# Altium PCB PCB1.PcbDoc
Units mil, origin at the board's own origin, x right, y up, seen from the top; angles counter-clockwise.
Board outline 6456.69 x 1771.65 mil, 2 copper layers (Top Layer, Bottom Layer); 73 components, 34 nets, 171 pads, 112 vias.
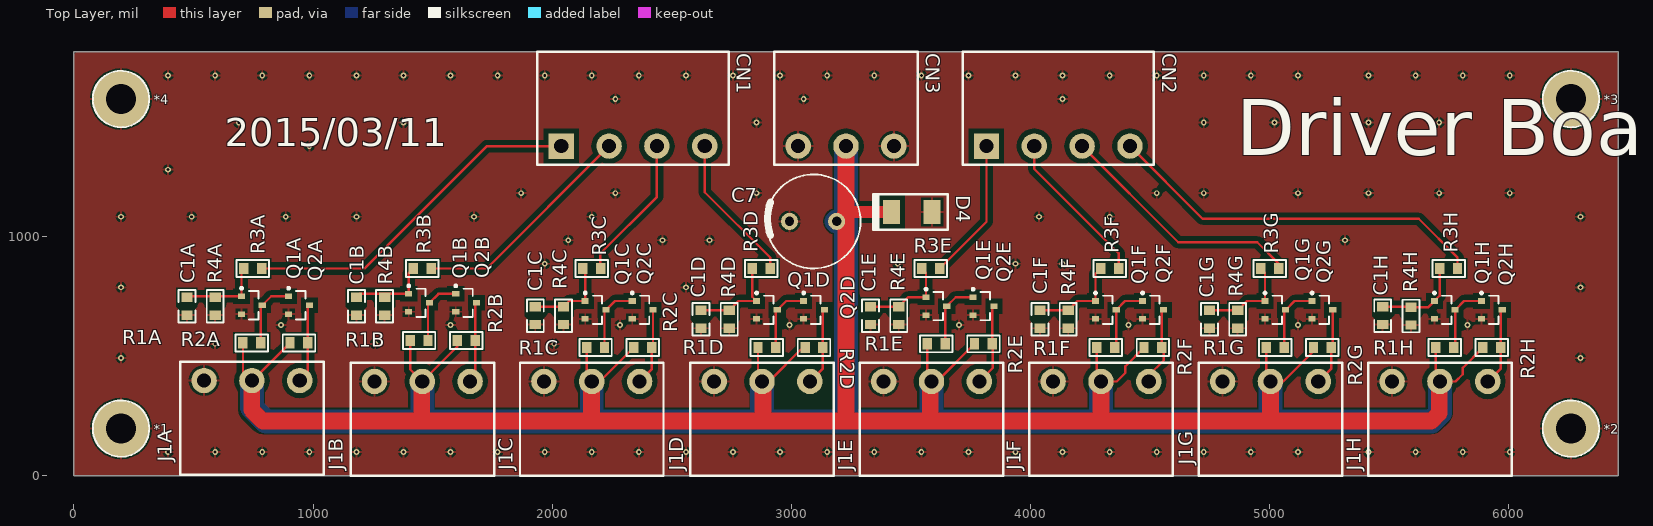
[diagram p0: Top Layer view]
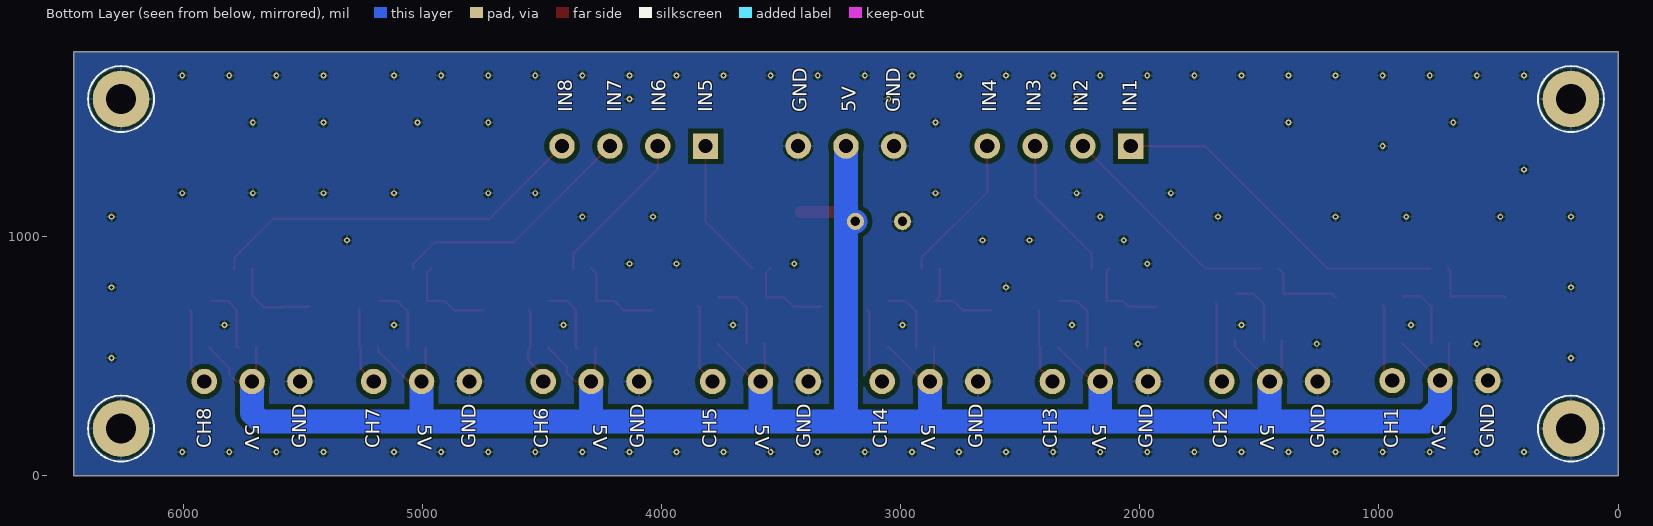
[diagram p1: Bottom Layer view, seen from below]

## Layer stack, top to bottom
Top Solder: solder mask 0.4, Solder Resist, Dk 3.5
Top Layer: signal copper 1.4
Dielectric 1: dielectric 12.6, FR-4, Dk 4.8
Bottom Layer: signal copper 1.4
Bottom Solder: solder mask 0.4, Solder Resist, Dk 3.5

## Board outline
0,0 6456.69,0 6456.69,1771.65 0,1771.65

## Design rules (kind name [scope] priority, off if disabled: settings)
Clearance [All] p1: gap=10 except(20: Poly-Poly SMDPad-Poly Track-Poly Via-Poly Arc-Poly Fill-Poly THPad-Poly)
HoleSize [All] p1: absolutevalues=TRUE maxlimit=99999 minlimit=1 maxpercent=80.000 minpercent=20.000
PolygonConnect [All] p1: connectstyle=Relief reliefconductorwidth=10 reliefentries=4 polygonreliefangle="90 Angle" airgapwidth=10
RoutingVias [All] p1: holewidth=12 width=24 viastyle="Through Hole" minholewidth=12 minwidth=24 maxholewidth=28 maxwidth=50
SilkToSilkClearance [All] p1: silktosilkclearance=0
SilkToSolderMaskClearance [IsPad] p1: minsilkscreentomaskgap=0 clearancetoexposedcopper=TRUE
SolderMaskExpansion [All] p1: expansion=4
UnpouredPolygon [All] p1: allowunpoured=FALSE
Width [All] p1: maxlimit=100 minlimit=10 preferedwidth=10
26 further rules are at their usual default settings.

## Classes and differential pairs
component class A: C1A J1A Q1A Q2A R1A R2A R3A R4A
component class B: C1B J1B Q1B Q2B R1B R2B R3B R4B
component class C: C1C J1C Q1C Q2C R1C R2C R3C R4C
component class D: C1D J1D Q1D Q2D R1D R2D R3D R4D
component class E: C1E J1E Q1E Q2E R1E R2E R3E R4E
component class F: C1F J1F Q1F Q2F R1F R2F R3F R4F
component class G: C1G J1G Q1G Q2G R1G R2G R3G R4G
component class H: C1H J1H Q1H Q2H R1H R2H R3H R4H
channel class Sheet1: U_Sheet11 U_Sheet12 U_Sheet13 U_Sheet14 U_Sheet15 U_Sheet16 U_Sheet17 U_Sheet18
component class Sheet2: C7 CN1 CN2 CN3 D4

## Components (designator, comment, footprint, x,y, rotation, side; value= is the part's Value field where it differs from the comment)
*1 "Comment" SCREWFG3_2 196.85,196.85 r0 top
*2 "Comment" SCREWFG3_2 6259.84,196.85 r0 top
*3 "Comment" SCREWFG3_2 6259.84,1574.8 r0 top
*4 "Comment" SCREWFG3_2 196.85,1574.8 r0 top
C1A "CAP 0.1uF 50V 0805(2012)" C0805 472.44,708.66 r270 top (schematic designator C1)
C1B "CAP 0.1uF 50V 0805(2012)" C0805 1181.1,708.66 r270 top (schematic designator C1)
C1C "CAP 0.1uF 50V 0805(2012)" C0805 1929.13,669.29 r270 top (schematic designator C1)
C1D "CAP 0.1uF 50V 0805(2012)" C0805 2622.05,653.54 r270 top (schematic designator C1)
C1E "CAP 0.1uF 50V 0805(2012)" C0805 3330.71,669.29 r270 top (schematic designator C1)
C1F "CAP 0.1uF 50V 0805(2012)" C0805 4039.37,653.54 r270 top (schematic designator C1)
C1G "CAP 0.1uF 50V 0805(2012)" C0805 4748.03,653.54 r270 top (schematic designator C1)
C1H "CAP 0.1uF 50V 0805(2012)" C0805 5472.44,669.29 r270 top (schematic designator C1)
C7 "CAPACITOR 330uF 20% 35V 10mmX16mm" CA10X16P5 2992.13,1062.99 r0 top
CN1 "HT5.08-4P-H" HT5.08-4P-H 2037.8,1377.95 r0 top
CN2 "HT5.08-4P-H" HT5.08-4P-H 3815.75,1377.95 r0 top
CN3 "HT5.08-3P-H" HT5.08-3P-H 3028.35,1377.95 r0 top
D4 "SMAJ5.0A" SMA 3503.94,1102.36 r270 top
J1A "HT5.08-3P-H" HT5.08-3P-H 944.1,397.64 r180 top (schematic designator J1)
J1B "HT5.08-3P-H" HT5.08-3P-H 1656.69,393.7 r180 top (schematic designator J1)
J1C "HT5.08-3P-H" HT5.08-3P-H 2365.35,393.7 r180 top (schematic designator J1)
J1D "HT5.08-3P-H" HT5.08-3P-H 3077.17,393.7 r180 top (schematic designator J1)
J1E "HT5.08-3P-H" HT5.08-3P-H 3785.83,393.7 r180 top (schematic designator J1)
J1F "HT5.08-3P-H" HT5.08-3P-H 4494.49,393.7 r180 top (schematic designator J1)
J1G "HT5.08-3P-H" HT5.08-3P-H 5203.15,393.7 r180 top (schematic designator J1)
J1H "HT5.08-3P-H" HT5.08-3P-H 5911.81,393.7 r180 top (schematic designator J1)
Q1A "BCV47,SOT23" INF-SOT23_L 744.1,712.6 r0 top (schematic designator Q1)
Q1B "BCV47,SOT23" INF-SOT23_L 1443.07,722.6 r0 top (schematic designator Q1)
Q1C "BCV47,SOT23" INF-SOT23_L 2181.1,692.91 r0 top (schematic designator Q1)
Q1D "BCV47,SOT23" INF-SOT23_L 2897.64,692.91 r0 top (schematic designator Q1)
Q1E "BCV47,SOT23" INF-SOT23_L 3606.3,708.66 r0 top (schematic designator Q1)
Q1F "BCV47,SOT23" INF-SOT23_L 4314.96,692.91 r0 top (schematic designator Q1)
Q1G "BCV47,SOT23" INF-SOT23_L 5023.62,692.91 r0 top (schematic designator Q1)
Q1H "BCV47,SOT23" INF-SOT23_L 5732.28,692.91 r0 top (schematic designator Q1)
Q2A "BCV47,SOT23" INF-SOT23_L 940.95,712.6 r0 top (schematic designator Q2)
Q2B "BCV47,SOT23" INF-SOT23_L 1639.92,722.6 r0 top (schematic designator Q2)
Q2C "BCV47,SOT23" INF-SOT23_L 2377.95,692.91 r0 top (schematic designator Q2)
Q2D "BCV47,SOT23" INF-SOT23_L 3094.49,692.91 r0 top (schematic designator Q2)
Q2E "BCV47,SOT23" INF-SOT23_L 3803.15,708.66 r0 top (schematic designator Q2)
Q2F "BCV47,SOT23" INF-SOT23_L 4511.81,692.91 r0 top (schematic designator Q2)
Q2G "BCV47,SOT23" INF-SOT23_L 5220.47,692.91 r0 top (schematic designator Q2)
Q2H "BCV47,SOT23" INF-SOT23_L 5929.13,692.91 r0 top (schematic designator Q2)
R1A "RES 10K 5% 0805(2012)" R0805 744.1,555.12 r0 top (schematic designator R1)
R1B "RES 10K 5% 0805(2012)" R0805 1443.07,565.12 r0 top (schematic designator R1)
R1C "RES 10K 5% 0805(2012)" R0805 2181.1,535.43 r0 top (schematic designator R1)
R1D "RES 10K 5% 0805(2012)" R0805 2897.64,535.43 r0 top (schematic designator R1)
R1E "RES 10K 5% 0805(2012)" R0805 3606.3,551.18 r0 top (schematic designator R1)
R1F "RES 10K 5% 0805(2012)" R0805 4314.96,535.43 r0 top (schematic designator R1)
R1G "RES 10K 5% 0805(2012)" R0805 5023.62,535.43 r0 top (schematic designator R1)
R1H "RES 10K 5% 0805(2012)" R0805 5732.28,535.43 r0 top (schematic designator R1)
R2A "RES 10K 5% 0805(2012)" R0805 940.95,555.12 r0 top (schematic designator R2)
R2B "RES 10K 5% 0805(2012)" R0805 1639.92,565.12 r0 top (schematic designator R2)
R2C "RES 10K 5% 0805(2012)" R0805 2377.95,535.43 r0 top (schematic designator R2)
R2D "RES 10K 5% 0805(2012)" R0805 3094.49,535.43 r0 top (schematic designator R2)
R2E "RES 10K 5% 0805(2012)" R0805 3803.15,551.18 r0 top (schematic designator R2)
R2F "RES 10K 5% 0805(2012)" R0805 4511.81,535.43 r0 top (schematic designator R2)
R2G "RES 10K 5% 0805(2012)" R0805 5220.47,535.43 r0 top (schematic designator R2)
R2H "RES 10K 5% 0805(2012)" R0805 5929.13,535.43 r0 top (schematic designator R2)
R3A "RES 20K 5% 0805(2012)" R0805 748.03,866.14 r0 top (schematic designator R3)
R3B "RES 20K 5% 0805(2012)" R0805 1456.69,866.14 r0 top (schematic designator R3)
R3C "RES 20K 5% 0805(2012)" R0805 2165.35,866.14 r0 top (schematic designator R3)
R3D "RES 20K 5% 0805(2012)" R0805 2874.02,866.14 r0 top (schematic designator R3)
R3E "RES 20K 5% 0805(2012)" R0805 3582.68,866.14 r0 top (schematic designator R3)
R3F "RES 20K 5% 0805(2012)" R0805 4330.71,866.14 r0 top (schematic designator R3)
R3G "RES 20K 5% 0805(2012)" R0805 5000,866.14 r0 top (schematic designator R3)
R3H "RES 20K 5% 0805(2012)" R0805 5748.03,866.14 r0 top (schematic designator R3)
R4A "RES 10K 5% 0805(2012)" R0805 590.55,708.66 r270 top (schematic designator R4)
R4B "RES 10K 5% 0805(2012)" R0805 1299.21,708.66 r270 top (schematic designator R4)
R4C "RES 10K 5% 0805(2012)" R0805 2047.24,669.29 r270 top (schematic designator R4)
R4D "RES 10K 5% 0805(2012)" R0805 2740.16,653.54 r270 top (schematic designator R4)
R4E "RES 10K 5% 0805(2012)" R0805 3448.82,669.29 r270 top (schematic designator R4)
R4F "RES 10K 5% 0805(2012)" R0805 4157.48,653.54 r270 top (schematic designator R4)
R4G "RES 10K 5% 0805(2012)" R0805 4866.14,653.54 r270 top (schematic designator R4)
R4H "RES 10K 5% 0805(2012)" R0805 5590.55,667.32 r270 top (schematic designator R4)

## Footprints (in the part's own frame and the unit in brackets; to place one, negate y for a bottom-side part, rotate by r counter-clockwise, add the part's x,y. Pads: shape width x height; smd on the part's side, far side on the other; paste and mask are expansions set on the pad)
C0805 [mm]
  rect 1x1.2 smd: 1(-0.95,0) 2(0.95,0)
  silkscreen extent -1.73,-0.9 1.73,0.9, body extent -1.55,-0.7 1.55,0.7, height 1
CA10X16P5 [mm]
  round 1.8 hole 1: 1(0,0) 2(5,0)
  silkscreen extent -2.46,-5 7.54,5, body extent -2.47,-5.01 7.55,5.01, height 16
HT5.08-3P-H [mm]
  round 2.7 hole 1.5: 1(0,0) 2(5.08,0) 3(10.16,0)
  silkscreen extent -2.54,-2 12.7,10, body extent -2.54,-2.03 12.7,10.03, height 12
HT5.08-4P-H [mm]
  rect 2.7x2.7 hole 1.5: 1(0,0)
  round 2.7 hole 1.5: 2(5.08,0) 3(10.16,0) 4(15.24,0)
  silkscreen extent -2.54,-2 17.78,10, body extent -2.54,-2.03 17.78,10.03, height 12
INF-SOT23_L [mm] "SOT23, 3-Leads, Body 2.9x1.3 mm, Pitch 0.95 mm, IPC High Density"
  rect 0.75x0.6 smd: 1(-1.1,0.95) 2(-1.1,-0.95) 3(1.1,0)
  silkscreen extent -1.22,-1.5 0.7,1.92, body extent -0.7,-1.5 0.7,1.5, height 1.1
R0805 [mm]
  rect 1x1.2 smd: 1(-0.95,0) 2(0.95,0)
  silkscreen extent -1.73,-0.9 1.73,0.9, body extent -1.55,-0.7 1.55,0.7, height 1
SCREWFG3_2 [mm]
  round 6 hole 3.2: 1(0,0)
  silkscreen extent -3,-3 3,3
SMA [mm]
  rect 2.5x1.8 smd: 1(0,-2.15) 2(0,2.15)
  silkscreen extent -1.91,-4.13 1.91,3.81, body extent -1.97,-4.19 1.97,3.87, height 2.5

## Part data
C1A C1B C1C C1D C1E C1F C1G C1H: library part EC00014, "CAP SMD CR X7R 50V 10% 0.1uF 0805 ROHS"
C7: library part EC00095, "CAP 35V 20% 330uF 10X16X0.6MM ROHS，7000hours"
CN1 CN2: library part "Header 4", "Header, 4-Pin"
CN3 J1A J1B J1C J1D J1E J1F J1G J1H: library part "Header 3", "Header, 3-Pin"
D4: library part ED00032
Q1A Q1B Q1C Q1D Q1E Q1F Q1G Q1H Q2A Q2B Q2C Q2D Q2E Q2F Q2G Q2H: library part CMP-1196-00014-1, "NPN Silicon Darlington Transistor, 60 V VCEO, 500 mA IC, SOT23, Reel, Green"
R1A R1B R1C R1D R1E R1F R1G R1H R2A R2B R2C R2D R2E R2F R2G R2H R4A R4B R4C R4D R4E R4F R4G R4H: library part ER00213, "RES THICK_FILM SMD 10K ohm 5% 1/10W ROHS 0603"
R3A R3B R3C R3D R3E R3F R3G R3H: library part ER00035, "RES THICK_FILM SMD 100 OHM 5% 1/8W ROHS 0805"

## Via types
v1: diameter 24, hole 12, Top Layer to Bottom Layer, tented both sides, 112 vias

## Nets (pads, with @x,y where several pads share a name; then routed paths per layer and width w, separated by ;. In a path a pad name is that pad's centre, name@x,y a point inside that pad or via, vN(x,y) a via of type N, cw(c..) or ccw(c..) an arc to the next point about the centre after c; other vN are vias at no path point)
CH_1: CN1.1 R3A.2 | length 1464.4
  Top Layer w10: R3A.2 1215.14,866.14 1726.95,1377.95 CN1.1
CH_2: CN1.2 R3B.2 | length 955.7
  Top Layer w10: R3B.2 1725.98,866.14 CN1.2
CH_3: CN1.3 R3C.2 | length 610.6
  Top Layer w10: R3C.2 2201,867.9 2201,929 2437.8,1165.8 CN1.3
CH_4: CN1.4 R3D.2 | length 625.1
  Top Layer w10: CN1.4 2637.8,1185.2 2911.42,911.58 R3D.2
CH_5: CN2.1 R3E.2 | length 592.9
  Top Layer w10: R3E.2 3815.75,1061.81 CN2.1
CH_6: CN2.2 R3F.2 | length 657.8
  Top Layer w10: CN2.2 4015.75,1282.25 4368.11,929.89 R3F.2
CH_7: CN2.3 R3G.2 | length 1045.6
  Top Layer w10: CN2.3 4617.7,976 4948,976 5037.4,886.6 R3G.2
CH_8: CN2.4 R3H.2 | length 1608.3
  Top Layer w10: CN2.4 4719.7,1074 5623,1074 5785.43,911.57 R3H.2
GND: *1.1 *2.1 *3.1 *4.1 C1A.2 C1B.2 C1C.2 C1D.2 C1E.2 C1F.2 C1G.2 C1H.2 C7.1 CN3.1 CN3.3 D4.2 J1A.3 J1B.3 J1C.3 J1D.3 J1E.3 J1F.3 J1G.3 J1H.3 Q1A.2 Q1B.2 Q1C.2 Q1D.2 Q1E.2 Q1F.2 Q1G.2 Q1H.2 Q2A.2 Q2B.2 Q2C.2 Q2D.2 Q2E.2 Q2F.2 Q2G.2 Q2H.2 R4A.2 R4B.2 R4C.2 R4D.2 R4E.2 R4F.2 R4G.2 R4H.2
  other v1: 393.7,98.43 590.55,98.43 787.4,98.43 984.25,98.43 1181.1,98.43 1377.95,98.43 1574.8,98.43 1771.65,98.43 1968.5,98.43 2165.35,98.43 2362.2,98.43 2559.06,98.43 2755.91,98.43 2952.76,98.43 3149.61,98.43 3346.46,98.43 3543.31,98.43 3740.16,98.43 3937.01,98.43 4133.86,98.43 4330.71,98.43 4527.56,98.43 4724.41,98.43 4921.26,98.43 5118.11,98.43 5413.39,98.43 5610.24,98.43 5807.09,98.43 6003.94,98.43 196.85,492.13 6299.21,492.13 590.55,551.18 1259.84,551.18 2007.87,551.18 866.14,629.92 1574.8,629.92 2283.46,629.92 2992.13,629.92 3700.79,629.92 4409.45,629.92 5118.11,629.92 5826.77,629.92 196.85,787.4 2559.06,787.4 6299.21,787.4 1968.5,885.83 3444.88,885.83 3937.01,885.83 4133.86,885.83 2066.93,984.25 2460.63,984.25 2657.48,984.25 5314.96,984.25 196.85,1082.68 492.13,1082.68 885.83,1082.68 1181.1,1082.68 1673.23,1082.68 2165.35,1082.68 4035.43,1082.68 4330.71,1082.68 6299.21,1082.68 1870.08,1181.1 2263.78,1181.1 2854.33,1181.1 4527.56,1181.1 4724.41,1181.1 5118.11,1181.1 5413.39,1181.1 5708.66,1181.1 6003.94,1181.1 393.7,1279.53 984.25,1377.95 688.98,1476.38 1377.95,1476.38 2854.33,1476.38 4724.41,1476.38 5019.68,1476.38 5413.39,1476.38 5708.66,1476.38 2263.78,1574.8 3051.18,1574.8 4133.86,1574.8 393.7,1673.23 590.55,1673.23 787.4,1673.23 984.25,1673.23 1181.1,1673.23 1377.95,1673.23 1574.8,1673.23 1771.65,1673.23 1968.5,1673.23 2165.35,1673.23 2362.2,1673.23 2559.06,1673.23 2755.91,1673.23 2952.76,1673.23 3149.61,1673.23 3346.46,1673.23 3543.31,1673.23 3740.16,1673.23 3937.01,1673.23 4133.86,1673.23 4330.71,1673.23 4527.56,1673.23 4724.41,1673.23 4921.26,1673.23 5118.11,1673.23 5413.39,1673.23 5610.24,1673.23 5807.09,1673.23 6003.94,1673.23
NetC1A_1: C1A.1 Q1A.1 R3A.1 R4A.1 | length 350.2
  Top Layer w10: C1A.1 476.38,750 Q1A.1 700.79,856.3 R3A.1
NetC1B_1: C1B.1 Q1B.1 R3B.1 R4B.1 | length 338.7
  Top Layer w10: C1B.1 1195.04,760 Q1B.1 1399.76,846.61 R3B.1
NetC1C_1: C1C.1 Q1C.1 R3C.1 R4C.1 | length 358.3
  Top Layer w10: C1C.1 R4C.1 2070.87,730.32 Q1C.1 2137.8,856.3 R3C.1
NetC1D_1: C1D.1 Q1D.1 R3D.1 R4D.1 | length 391.8
  Top Layer w10: C1D.1 R4D.1 2779.53,730.32 Q1D.1 2836.61,748.03 R3D.1
NetC1E_1: C1E.1 Q1E.1 R3E.1 R4E.1 | length 376
  Top Layer w10: C1E.1 R4E.1 3488.19,746.06 Q1E.1 3562.99,848.43 R3E.1
NetC1F_1: C1F.1 Q1F.1 R3F.1 R4F.1 | length 393.4
  Top Layer w10: C1F.1 R4F.1 4196.85,730.32 Q1F.1 4271.65,844.49 R3F.1
NetC1G_1: C1G.1 Q1G.1 R3G.1 R4G.1 | length 391.8
  Top Layer w10: C1G.1 R4G.1 4905.51,730.32 Q1G.1 4980.32,848.43 R3G.1
NetC1H_1: C1H.1 Q1H.1 R3H.1 R4H.1 | length 372.7
  Top Layer w10: C1H.1 5588.58,706.69 R4H.1 5663.39,704.73 Q1H.1 5710.63,751.97 R3H.1
NetJ1A_1: J1A.1 Q2A.3 R2A.2 | length 331.6
  Top Layer w10: J1A.1 978.35,431.89 R2A.2 978.35,706.69 Q2A.3
NetJ1B_1: J1B.1 Q2B.3 R2B.2 | length 339.9
  Top Layer w10: J1B.1 1677.32,414.33 R2B.2 1677.32,716.69 Q2B.3
NetJ1C_1: J1C.1 Q2C.3 R2C.2 | length 322.4
  Top Layer w10: J1C.1 2415.35,443.7 R2C.2 2421.26,541.34 Q2C.3
NetJ1D_1: J1D.1 Q2D.3 R2D.2 | length 324.3
  Top Layer w10: J1D.1 3131.89,448.43 R2D.2 3131.89,687.01 Q2D.3
NetJ1E_1: J1E.1 Q2E.3 R2E.2 | length 341.3
  Top Layer w10: J1E.1 3842,449.87 3842,549.73 R2E.2 3840.55,702.76 Q2E.3
NetJ1F_1: J1F.1 Q2F.3 R2F.2 | length 330.8
  Top Layer w10: J1F.1 4494.49,419.49 4557,482 4557,527.65 R2F.2 4549.21,687.01 Q2F.3
NetJ1G_1: J1G.1 Q2G.3 R2G.2 | length 324.3
  Top Layer w10: J1G.1 5257.87,448.43 R2G.2 5263.78,541.34 Q2G.3
NetJ1H_1: J1H.1 Q2H.3 R2H.2 | length 324.3
  Top Layer w10: J1H.1 5966.54,448.43 R2H.2 5966.54,687.01 Q2H.3
NetQ1A_3: Q1A.3 Q2A.1 R1A.2 | length 285.7
  Top Layer w10: R1A.2 781.5,706.69 Q1A.3 824.8,750 Q2A.1
NetQ1B_3: Q1B.3 Q2B.1 R1B.2 | length 285.7
  Top Layer w10: R1B.2 1480.47,716.69 Q1B.3 1523.78,760 Q2B.1
NetQ1C_3: Q1C.3 Q2C.1 R1C.2 | length 285.7
  Top Layer w10: R1C.2 2218.5,687.01 Q1C.3 2261.81,730.32 Q2C.1
NetQ1D_3: Q1D.3 Q2D.1 R1D.2 | length 285.7
  Top Layer w10: R1D.2 2935.04,687.01 Q1D.3 2978.35,730.32 Q2D.1
NetQ1E_3: Q1E.3 Q2E.1 R1E.2 | length 285.7
  Top Layer w10: R1E.2 3643.7,702.76 Q1E.3 3687.01,746.06 Q2E.1
NetQ1F_3: Q1F.3 Q2F.1 R1F.2 | length 285.7
  Top Layer w10: R1F.2 4358.27,541.34 Q1F.3 4395.67,730.32 Q2F.1
NetQ1G_3: Q1G.3 Q2G.1 R1G.2 | length 285.7
  Top Layer w10: R1G.2 5061.02,687.01 Q1G.3 5104.33,730.32 Q2G.1
NetQ1H_3: Q1H.3 Q2H.1 R1H.2 | length 285.7
  Top Layer w10: R1H.2 5775.59,541.34 Q1H.3 5812.99,730.32 Q2H.1
VCC: C7.2 CN3.2 D4.1 J1A.2 J1B.2 J1C.2 J1D.2 J1E.2 J1F.2 J1G.2 J1H.2 R1A.1 R1B.1 R1C.1 R1D.1 R1E.1 R1F.1 R1G.1 R1H.1 R2A.1 R2B.1 R2C.1 R2D.1 R2E.1 R2F.1 R2G.1 R2H.1 | length 18318.5
  Top Layer w10: R1A.1 706.69,435.04 J1A.2 746.06,397.64 R2A.1 ; R1B.1 1405.67,444.73 J1B.2 1602.52,539.53 R2B.1 ; R1C.1 2143.7,415.35 J1C.2 2198.82,393.7 R2C.1 ; R1D.1 2860.24,410.63 J1D.2 2905.7,393.7 3047.43,535.43 R2D.1 ; R1E.1 3568.9,410.63 J1E.2 3608.27,393.7 R2E.1 ; R1F.1 4277.56,410.63 J1F.2 4360.7,393.7 4396,429 4396,457.02 R2F.1 ; R1G.1 4986.22,410.63 J1G.2 5056.7,393.7 5183.07,520.07 R2G.1 ; R1H.1 5694.88,410.63 J1H.2 5776.7,393.7 5807,424 5807,450.7 R2H.1
  Top Layer w50: C7.2 3228.35,1102.36 D4.1
  Top Layer w70: J1A.2 743,396.54 743,275 789.35,228.65 1454,228.65 ; J1B.2 1454,391.01 1454,228.65 ; J1C.2 2164,392.35 2164,228.65 ; J1D.2 2881,389.87 2881,228.65 ; CN3.2 3228.35,1102.36 3228.35,228.65 ; J1E.2 3581,388.87 3581,228 ; J1F.2 4295,393.19 4295,228 ; J1G.2 5003.15,236.85 5012,228 ; J1H.2 5709,390.89 5709,261 5676,228 5012,228 ; 1454,228.65 2164,228.65 ; 2164,228.65 2881,228.65 ; 2881,228.65 3228.35,228.65 ; 3228.35,228.65 3229,228 3581,228 ; 3581,228 4295,228 ; 4295,228 5012,228
  Bottom Layer w100: J1A.2 744.1,284.9 802,227 1449,227 ; J1B.2 1456.69,234.69 1449,227 ; J1C.2 2165.35,236.64 2175,227 ; J1D.2 2877.17,228.83 2879,227 ; C7.2 3224.35,1062.99 3228.35,1059 ; CN3.2 3228.35,1059 ; J1E.2 3585.83,238.83 3574,227 ; J1F.2 4294.49,229.51 4297,227 ; J1G.2 5003.15,229.15 5001,227 ; J1H.2 5711.81,261.81 5677,227 5001,227 ; 1449,227 2175,227 ; 2175,227 2879,227 ; 2879,227 3227,227 ; 3227,227 3228.35,228.35 3228.35,1059 ; 3227,227 3574,227 ; 3574,227 4297,227 ; 4297,227 5001,227

## Polygon pours and split planes (outlines as drawn)
GND on Bottom Layer "GND_BOT" (solid, remove dead copper, pour order 2): 0,1771.65 0,0 6456.69,0 6456.69,1771.65
GND on Top Layer "GND_TOP" (solid, remove dead copper, pour order 4): 0,1771.65 0,0 6456.69,0 6456.69,1771.65

## Silkscreen, mask and mechanical layers (free items; w line width, h text height)
Top Overlay:
  text "2015/03/11" at 629.92,1338.58 h200
  text "Driver Board" at 4860,1263 h400
Bottom Overlay:
  text "IN1" at 2013,1520 h60 r270
  text "IN2" at 2217,1520 h60 r270
  text "IN3" at 2415,1520 h60 r270
  text "IN4" at 2600,1520 h60 r270
  text "GND" at 3002,1520 h60 r270
  text "5V" at 3187,1520 h60 r270
  text "GND" at 3393,1520 h60 r270
  text "IN5" at 3787,1520 h60 r270
  text "IN6" at 3983,1520 h60 r270
  text "IN7" at 4168,1520 h60 r270
  text "IN8" at 4372,1520 h60 r270
  text "5V" at 780,214.97 h60 r90
  text "5V" at 1497,214.97 h60 r90
  text "5V" at 2198,214.97 h60 r90
  text "5V" at 2913,214.97 h60 r90
  text "5V" at 3608,214.97 h60 r90
  text "5V" at 4286,214.97 h60 r90
  text "5V" at 5019,214.97 h60 r90
  text "5V" at 5741,214.97 h60 r90
  text "GND" at 518,115 h60 r270
  text "CH1" at 920,115 h60 r270
  text "GND" at 1226,115 h60 r270
  text "CH2" at 1635,115 h60 r270
  text "GND" at 1946,115 h60 r270
  text "CH3" at 2346,115 h60 r270
  text "GND" at 2656,115 h60 r270
  text "CH4" at 3056,115 h60 r270
  text "GND" at 3376,115 h60 r270
  text "CH5" at 3768,115 h60 r270
  text "GND" at 4072,115 h60 r270
  text "CH6" at 4474,115 h60 r270
  text "GND" at 4777,115 h60 r270
  text "CH7" at 5179,115 h60 r270
  text "GND" at 5485,115 h60 r270
  text "CH8" at 5882,115 h60 r270
Mechanical 1:
  the board outline again, w5

## Dimensions
0,1771.65 to 0,0 on Mechanical 16
0,0 to 6456.69,0 on Mechanical 16

## Text inside footprints (layer, text, board x,y; h text height)
*1: Drill Drawing "PTH" at 153.54,27.56 h47.24
*2: Drill Drawing "PTH" at 6216.54,27.56 h47.24
*3: Drill Drawing "PTH" at 6216.54,1405.51 h47.24
*4: Drill Drawing "PTH" at 153.54,1405.51 h47.24